# Altium PCB PCB1.PcbDoc
Units mm, origin at the board's own origin, x right, y up, seen from the top; angles counter-clockwise.
Board outline 99 x 99 mm, 2 copper layers (Top Layer, Bottom Layer); 73 components, 87 nets, 300 pads, 38 vias.
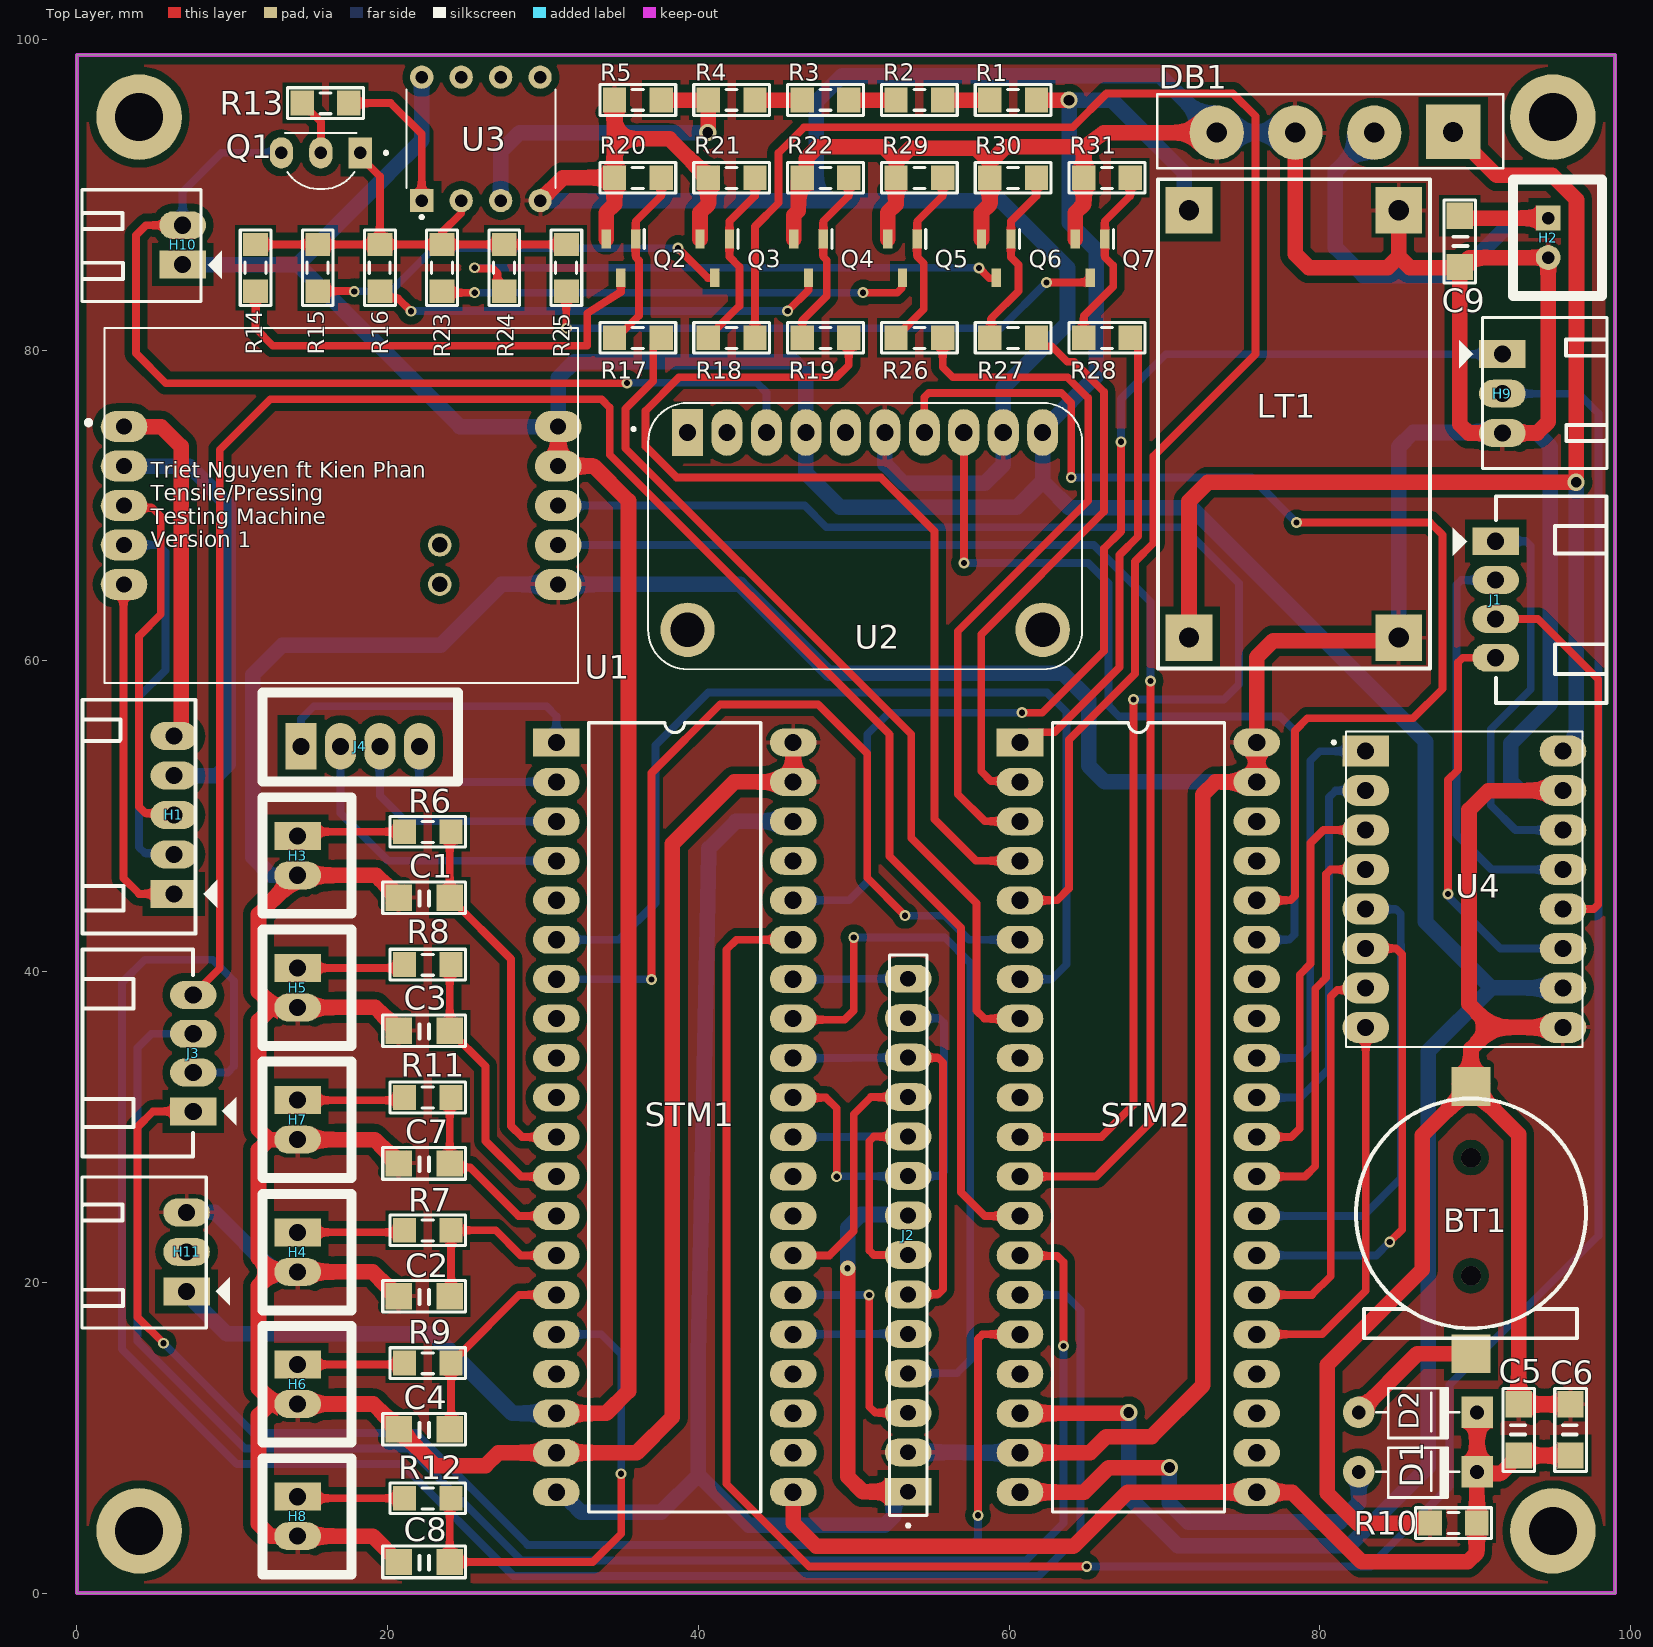
[diagram p0: Top Layer view]
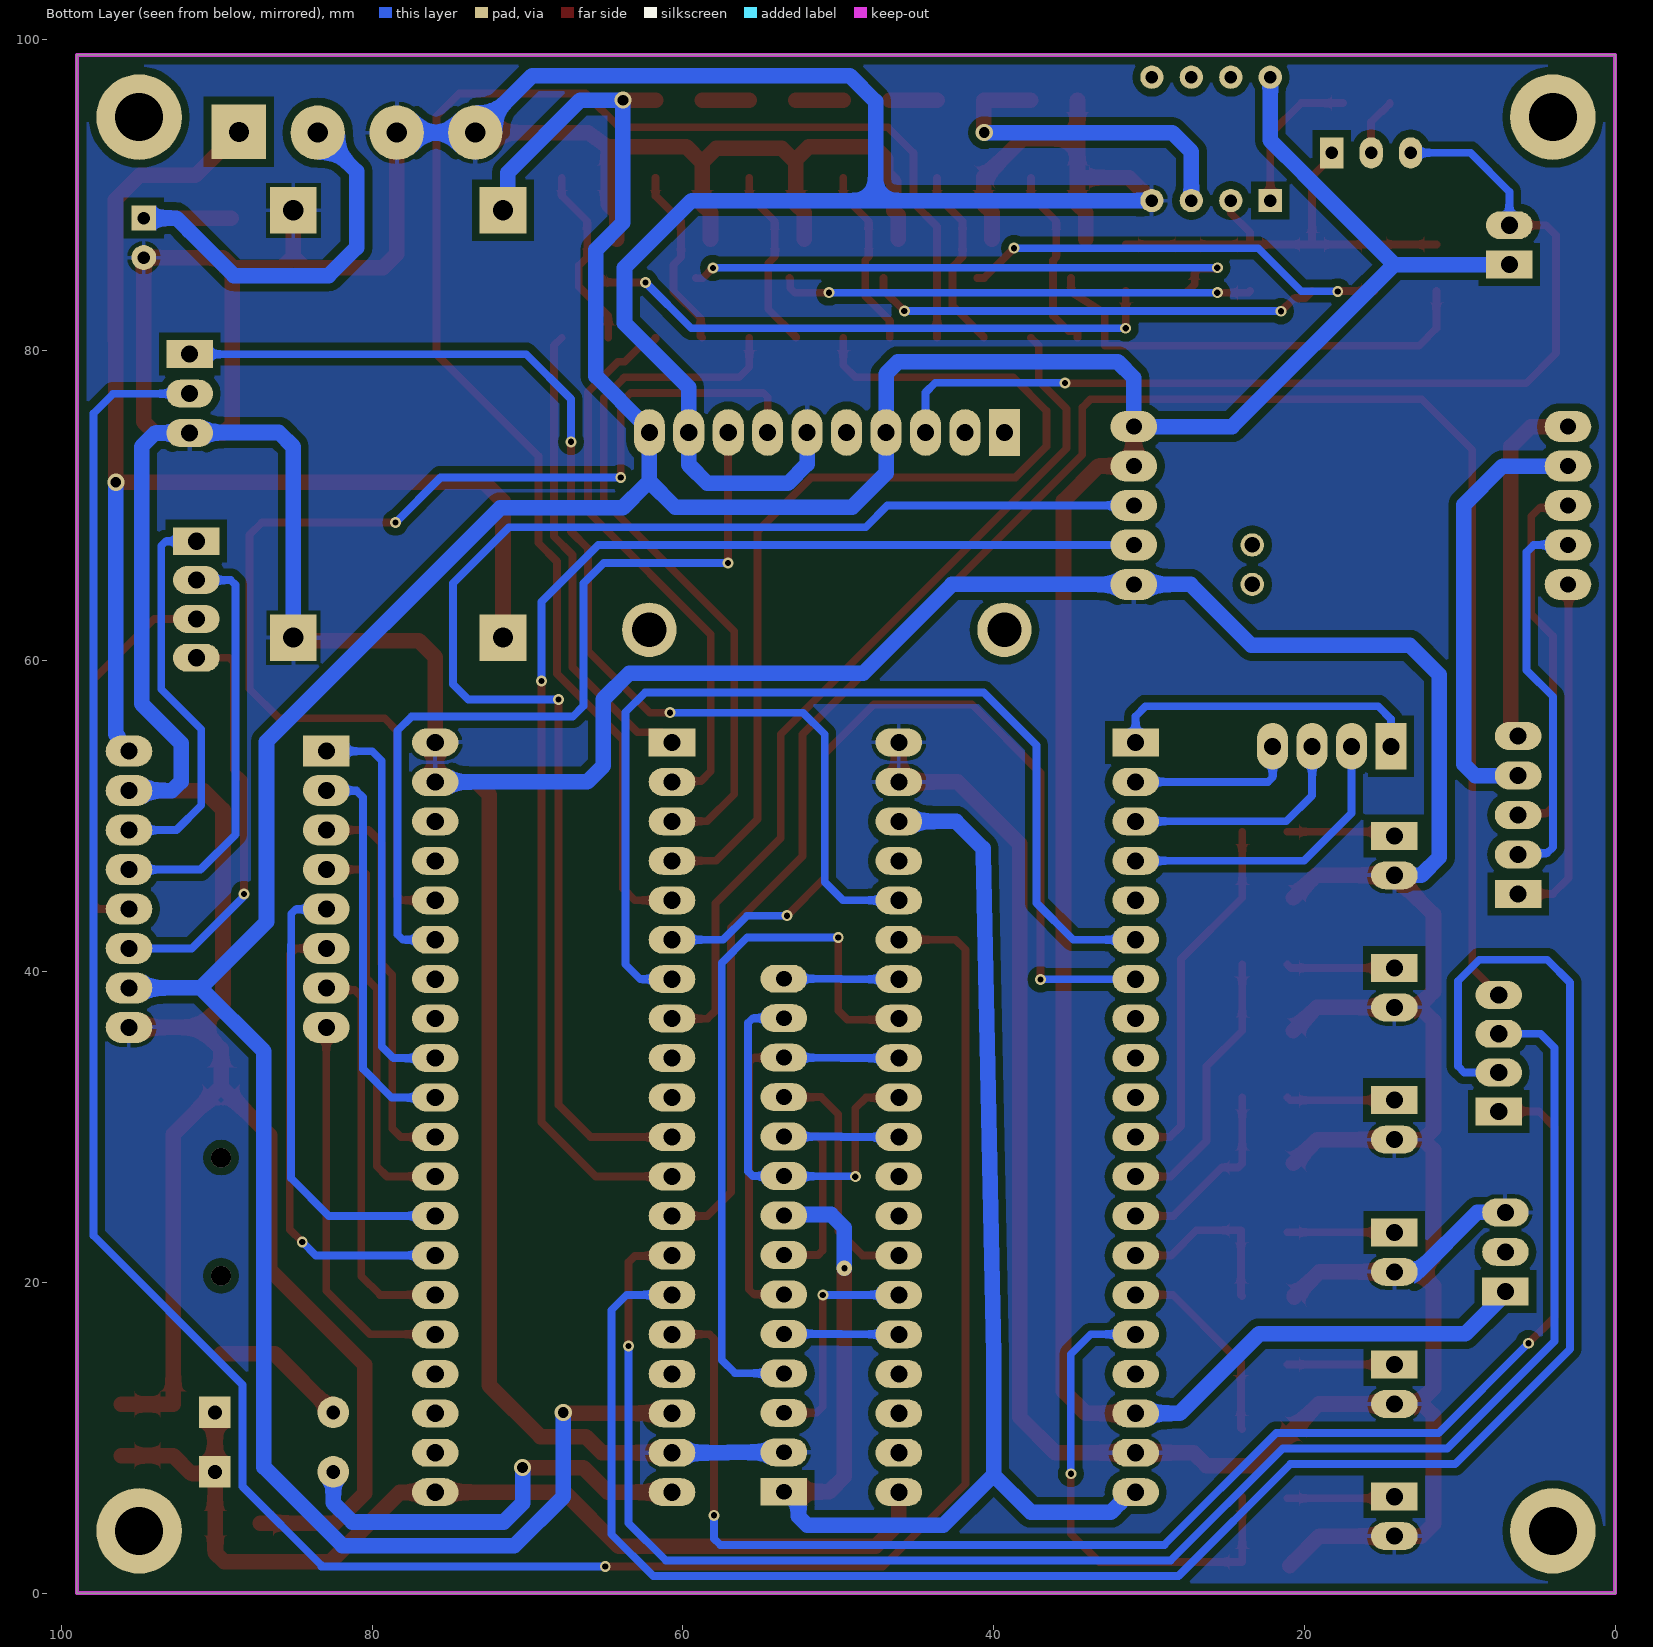
[diagram p1: Bottom Layer view, seen from below]
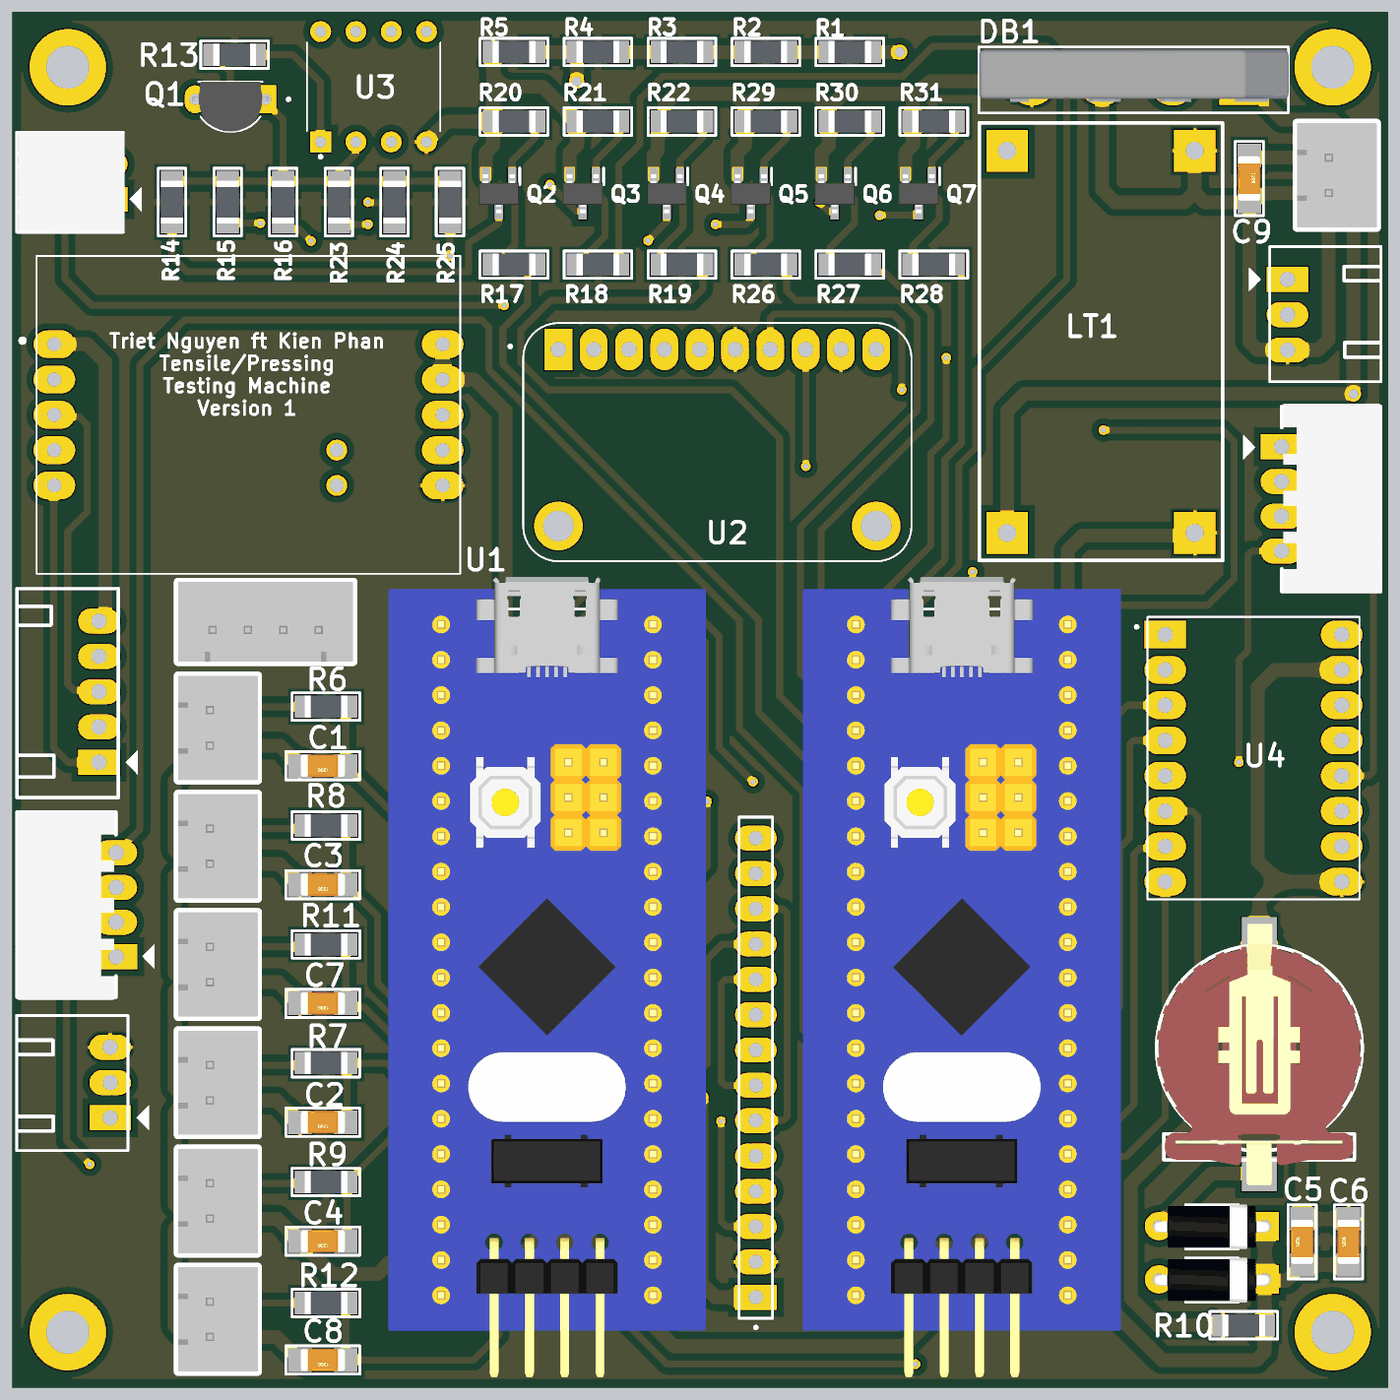
[diagram p2: 3D render of the assembled board from above, using the file's embedded part models]

## Layer stack, top to bottom
Top Solder: solder mask 0.0102, Solder Resist, Dk 3.5
Top Layer: signal copper 0.0356
Dielectric 1: dielectric 0.32, FR-4, Dk 4.8
Bottom Layer: signal copper 0.0356
Bottom Solder: solder mask 0.0102, Solder Resist, Dk 3.5

## Board outline
0,0 0,99 99,99 99,0

## Design rules (kind name [scope] priority, off if disabled: settings)
Clearance [All] p1: gap=0.5 ignorepadtopadclearanceinfootprint=FALSE
HoleSize [All] p1: absolutevalues=TRUE maxlimit=3.2 minlimit=0.025 maxpercent=80.000 minpercent=20.000
PolygonConnect [All] p1: connectstyle=Relief reliefconductorwidth=0.254 reliefentries=4 polygonreliefangle="90 Angle" airgapwidth=0.254
RoutingVias RoutingVias_power [InNetClass('power_class')] p1: holewidth=0.7 width=1.1 viastyle="Through Hole" minholewidth=0.7 minwidth=1.1 maxholewidth=0.7 maxwidth=1.1
RoutingVias RoutingVias_signal [All] p2: holewidth=0.4 width=0.7 viastyle="Through Hole" minholewidth=0.4 minwidth=0.7 maxholewidth=0.4 maxwidth=0.7
SilkToSilkClearance [All] p1: silktosilkclearance=0
SilkToSolderMaskClearance [IsPad] p1: minsilkscreentomaskgap=0 clearancetoexposedcopper=TRUE
SolderMaskExpansion [All] p1: expansion=0.102 istentingtop=FALSE
Width Width_power [InNetClass('power_class')] p1: maxlimit=2 minlimit=0.7 preferedwidth=1
Width Width_signal [All] p2: maxlimit=0.5 minlimit=0.5 preferedwidth=0.5
27 further rules are at their usual default settings.

## Classes and differential pairs
net class power_class: +5 +12 B_3.3V BLK GND IN+ NetBT1_1 NetR1_1 NetR2_1 NetR3_1 RED T_3.3V VBAT VCC

## Components (designator, comment, footprint, x,y, rotation, side; value= is the part's Value field where it differs from the comment)
BT1 "CR1220 SMD" "DE PIN CR1220" 89.723,24 r0 top
C1 "10nF" "Cap 1206" 22.35,44.75 r180 top
C2 "10nF" "Cap 1206" 22.35,19.1 r180 top
C3 "10nF" "Cap 1206" 22.35,36.2 r180 top
C4 "10nF" "Cap 1206" 22.35,10.55 r180 top
C5 "4.7uF" "Cap 1206" 92.8,10.5 r90 top
C6 "100nF" "Cap 1206" 96.136,10.5 r90 top
C7 "10nF" "Cap 1206" 22.35,27.65 r180 top
C8 "10nF" "Cap 1206" 22.35,2 r180 top
C9 "100uF" "Cap 1206" 89,87 r270 top
D1 "0.3V" "DIODE 1A" 81.23,7.8 r180 top
D2 "0.3V" "DIODE 1A" 81.23,11.629 r180 top
DB1 "6A 1000V" "DIODE CAU 6A CAM" 88.58,94 r180 top
H1 "LOADCELL" "Header 5P DC 2.54" 6.241,45 r180 top
H2 "POWER" XH2.54M-2#1 94.7,88.5 r270 top
H3 "BUTTON1" XH2.54M-2#2 14.2,48.74 r270 top
H4 "BUTTON4" XH2.54M-2#2 14.2,23.216 r270 top
H5 "BUTTON2" XH2.54M-2#2 14.2,40.232 r270 top
H6 "BUTTON5" XH2.54M-2#2 14.2,14.708 r270 top
H7 "BUTTON3" XH2.54M-2#2 14.2,31.724 r270 top
H8 "BUTTON6" XH2.54M-2#2 14.2,6.2 r270 top
H9 "COMPORT" "Header 3P DC 2.54" 91.746,79.74 r0 top
H10 "QUEDO" "Header 2P DC 2.54" 6.8,85.5 r180 top
H11 "AD5600" "Header 3P DC 2.54" 7.054,19.42 r180 top
J1 "MOTOR" "Header 4P DC 2.54" 91.34,67.675 r0 top
J2 "TFT_TOUCH" SAMTEC_ESQ-114-38-G-S 53.5,6.52 r90 top
J3 "AD5600" "Header 4P DC 2.54" 7.46,31.025 r180 top
J4 "SDCARD" XH2.54M-4 14.42,54.5 r0 top
LT1 "LT3045" PCBComponent_1 85.078,61.5 r90 top
Q1 "2N3904" TO92254P460H750-3 15.7,92.7 r180 top
Q2 "AO3400" SOT95P280X125-3N 35.012,85.9 r270 top
Q3 "AO3400" SOT95P280X125-3N 41.052,85.9 r270 top
Q4 "AO3400" SOT95P280X125-3N 47.092,85.9 r270 top
Q5 "AO3400" SOT95P280X125-3N 53.132,85.9 r270 top
Q6 "AO3400" SOT95P280X125-3N 59.172,85.9 r270 top
Q7 "AO3400" SOT95P280X125-3N 65.212,85.9 r270 top
R1 "1K" "RES 1206" 60.26,96.1 r0 top
R2 "1K" "RES 1206" 54.22,96.1 r0 top
R3 "1K" "RES 1206" 48.18,96.1 r0 top
R4 "1K" "RES 1206" 42.14,96.1 r0 top
R5 "1K" "RES 1206" 36.1,96.1 r0 top
R6 "100R" "RES 1206" 22.579,49 r180 top
R7 "100R" "RES 1206" 22.579,23.35 r180 top
R8 "100R" "RES 1206" 22.579,40.45 r180 top
R9 "100R" "RES 1206" 22.579,14.8 r180 top
R10 "1M" "RES 1206" 88.6,4.5 r0 top
R11 "100R" "RES 1206" 22.579,31.9 r180 top
R12 "100R" "RES 1206" 22.579,6.1 r180 top
R13 "1K" "RES 1206" 16,95.9 r180 top
R14 "10R" "RES 1206" 11.5,85.3 r90 top
R15 "100R" "RES 1206" 15.5,85.3 r90 top
R16 "1K" "RES 1206" 19.5,85.3 r90 top
R17 "1K" "RES 1206" 36.1,80.8 r180 top
R18 "1K" "RES 1206" 42.14,80.8 r180 top
R19 "1K" "RES 1206" 48.18,80.8 r180 top
R20 "10K" "RES 1206" 36.1,91.1 r180 top
R21 "10K" "RES 1206" 42.14,91.1 r180 top
R22 "10K" "RES 1206" 48.18,91.1 r180 top
R23 "10K" "RES 1206" 23.5,85.3 r90 top
R24 "100K" "RES 1206" 27.5,85.3 r90 top
R25 "1M" "RES 1206" 31.5,85.3 r90 top
R26 "1K" "RES 1206" 54.22,80.8 r180 top
R27 "1K" "RES 1206" 60.26,80.8 r180 top
R28 "1K" "RES 1206" 66.3,80.8 r180 top
R29 "10K" "RES 1206" 54.22,91.1 r180 top
R30 "10K" "RES 1206" 60.26,91.1 r180 top
R31 "10K" "RES 1206" 66.3,91.1 r180 top
STM1 "KIT STM32F103C8T6" "STM32F103 KIT" 30.86,54.75 r0 top
STM2 "KIT STM32F103C8T6" "STM32F103 KIT" 60.7,54.75 r0 top
U1 "SEN-13879" SPARKFUN_SEN-13879 17,70 r0 top
U2 "ADS1115" MODULE_ZC261500 50.73,68.032 r180 top
U3 "OPA2134PA" DIP794W45P254L959H508Q8 26,93.6 r90 top
U4 "A4988_STEPPER_MOTOR_DRIVER_CARRIER" MODULE_A4988_STEPPER_MOTOR_DRIVER_CARRIER 89.3,45.3 r0 top

## Footprints (in the part's own frame and the unit in brackets; to place one, negate y for a bottom-side part, rotate by r counter-clockwise, add the part's x,y. Pads: shape width x height; smd on the part's side, far side on the other; paste and mask are expansions set on the pad)
"Cap 1206" [mm]
  rect 1.7x1.7 smd: 1(-1.65,0) 2(1.65,0)
  silkscreen extent -2.67,-1.02 2.67,1.02, body extent -1.6,-0.8 1.6,0.8, height 1.02
"DE PIN CR1220" [mm]
  rect 2.5x2.5 smd: 1(0,-8.6) 2(0,8.6)
  silkscreen extent -7.39,-7.6 7.4,7.84, body extent -7.39,-9.42 7.36,9.38, height 4.27
"DIODE 1A" [mil] "Diode 1A"
  round 80 hole 35: 1(-50,0)
  rect 80x80 hole 35: 2(-350,0)
  silkscreen extent -305,-61 -95,65, body extent -366,-61 -34,65, height 122
"DIODE CAU 6A CAM" [mm] "DIODE CAU 6A CAM"
  rect 3.5x3.5 hole 1.3: 1(0,-0.051)
  round 3.5 hole 1.3: 2(5.08,0) 3(10.16,0) 4(15.215,0)
  silkscreen extent -3.23,-2.46 19.05,2.3, body extent -3.28,-2.29 19.02,1.47, height 23.8
DIP794W45P254L959H508Q8 [mm]
  rect 1.5x1.5 hole 0.8: 1(-3.97,3.81)
  round 1.5 hole 0.8: 2(-3.97,1.27) 3(-3.97,-1.27) 4(-3.97,-3.81) 5(3.97,-3.81) 6(3.97,-1.27) 7(3.97,1.27) 8(3.97,3.81)
  silkscreen extent -5.13,-4.79 3.18,4.8
"Header 2P DC 2.54" [mm]
  rect 3x1.8 hole 1.1: 1(0,0)
  oval 3x1.8 hole 1.1: 2(0,-2.54)
  silkscreen extent -2.53,-4.83 6.48,2.36, body extent -1.27,-4.82 6.35,2.28, height 6.01
"Header 3P DC 2.54" [mm]
  rect 3x1.8 hole 1.1: 1(0,0)
  oval 3x1.8 hole 1.1: 2(0,-2.54) 3(0,-5.08)
  silkscreen extent -2.78,-7.37 6.73,2.36
"Header 4P DC 2.54" [mm]
  rect 3x1.8 hole 1.1: 1(-0.025,0.025)
  oval 3x1.8 hole 1.1: 2(-0.025,-2.475) 3(-0.025,-4.975) 4(-0.025,-7.475)
  silkscreen extent -2.78,-10.39 7.11,2.92, body extent 0.13,-10.48 7.06,3.11, height 7.38
"Header 5P DC 2.54" [mm]
  rect 3x1.8 hole 1.1: 1(0,0)
  oval 3x1.8 hole 1.1: 2(0,-2.54) 3(0,-5.08) 4(0,-7.62) 5(0,-10.16)
  silkscreen extent -2.79,-12.5 5.89,2.54
MODULE_A4988_STEPPER_MOTOR_DRIVER_CARRIER [mm]
  rect 3x2 hole 1.1: 1(-6.35,8.89)
  oval 3x2 hole 1.1: 2(-6.35,6.35) 3(-6.35,3.81) 4(-6.35,1.27) 5(-6.35,-1.27) 6(-6.35,-3.81) 7(-6.35,-6.35) 8(-6.35,-8.89) 9(6.35,-8.89) 10(6.35,-6.35) 11(6.35,-3.81) 12(6.35,-1.27) 13(6.35,1.27) 14(6.35,3.81) 15(6.35,6.35) 16(6.35,8.89)
  silkscreen extent -8.5,-10.16 7.62,10.16
MODULE_ZC261500 [mm]
  rect 2x3 hole 1.1: 1(11.43,-6.668)
  oval 2x3 hole 1.1: 2(8.89,-6.668) 3(6.35,-6.668) 4(3.81,-6.668) 5(1.27,-6.668) 6(-1.27,-6.668) 7(-3.81,-6.668) 8(-6.35,-6.668) 9(-8.89,-6.668) 10(-11.43,-6.668)
  round 3.5 hole 2.2: P1(-11.43,6.032) P2(11.43,6.032)
  silkscreen extent -13.97,-8.57 15,8.57
PCBComponent_1 [mm]
  rect 3x3 hole 1.3: 1(27.5,13.5) 2(27.5,0) 3(0,0) 4(0,13.5)
  silkscreen extent -1.98,-2 29.5,15.51
"RES 1206" [mm]
  rect 1.5x1.6 smd: 1(-1.5,0) 2(1.5,0)
  silkscreen extent -2.44,-0.99 2.44,0.99, body extent -1.55,-0.8 1.55,0.8, height 0.55
SAMTEC_ESQ-114-38-G-S [mm]
  rect 1.8x3 hole 1.02: 01(0,0)
  oval 1.8x3 hole 1.02: 02(2.54,0) 03(5.08,0) 04(7.62,0) 05(10.16,0) 06(12.7,0) 07(15.24,0) 08(17.78,0) 09(20.32,0) 10(22.86,0) 11(25.4,0) 12(27.94,0) 13(30.48,0) 14(33.02,0)
  silkscreen extent -2.27,-1.2 34.54,1.21
SOT95P280X125-3N [mm]
  rect 1.2x0.6 smd: 1(-1.25,0.95) 2(-1.25,-0.95) 3(1.25,0)
  silkscreen extent -1.85,1.5 -0.65,1.5, body extent -1.4,-1.45 1.4,1.45, height 1.25
SPARKFUN_SEN-13879 [mil]
  oval 118.11x78.74 hole 40: 1(-550,200) 2(-550,100) 3(-550,0) 4(-550,-100) 5(-550,-200) 6(550,-200) 7(550,-100) 8(550,0) 9(550,100) 10(550,200)
  round 59.06 hole 39.37: 11(250,-100) 12(250,-200)
  silkscreen extent -646,-450 600,450
"STM32F103 KIT" [mm]
  rect 3x1.8 hole 1.1: 1(0,0)
  oval 3x1.8 hole 1.1: 2(0,-2.54) 3(0,-5.08) 4(0,-7.62) 5(0,-10.16) 6(0,-12.7) 7(0,-15.24) 8(0,-17.78) 9(0,-20.32) 10(0,-22.86) 11(0,-25.4) 12(0,-27.94) 13(0,-30.48) 14(0,-33.02) 15(0,-35.56) 16(0,-38.1) 17(0,-40.64) 18(0,-43.18) 19(0,-45.72) 20(0,-48.26) 21(15.24,-48.26) 22(15.24,-45.72) 23(15.24,-43.18) 24(15.24,-40.64) 25(15.24,-38.1) 26(15.24,-35.56) 27(15.24,-33.02) 28(15.24,-30.48) 29(15.24,-27.94) 30(15.24,-25.4) 31(15.24,-22.86) 32(15.24,-20.32) 33(15.24,-17.78) 34(15.24,-15.24) 35(15.24,-12.7) 36(15.24,-10.16) 37(15.24,-7.62) 38(15.24,-5.08) 39(15.24,-2.54) 40(15.24,0)
  silkscreen extent 2.09,-49.53 13.16,1.27, body extent -3.81,-53.97 19.05,3.59, height 16.12
TO92254P460H750-3 [mm]
  rect 1.5x2 hole 0.8: 1(-2.54,0)
  oval 1.5x2 hole 0.8: 2(0,0) 3(2.54,0)
  silkscreen extent -4.29,-1.27 2.3,2.33, body extent -2.74,-1.27 2.74,2.33, height 8.09
XH2.54M-2#1 [mm]
  rect 1.6x1.6 hole 0.8: 1(0,0)
  round 1.6 hole 0.8: 2(2.54,0)
  silkscreen extent -2.48,-2.26 5.02,3.46, body extent -2.48,-2.26 5.02,3.48, height 6.91
XH2.54M-2#2 [mm]
  rect 1.8x3 hole 1.1: 1(0,0)
  oval 1.8x3 hole 1.1: 2(2.54,0)
  silkscreen extent -2.48,-2.26 5.02,3.46, body extent -2.48,-2.26 5.02,3.48, height 6.91
XH2.54M-4 [mm]
  rect 2x3 hole 1.1: 1(0,0)
  oval 2x3 hole 1.1: 2(2.54,0) 3(5.08,0) 4(7.62,0)
  silkscreen extent -2.48,-2.26 10.1,3.46, body extent -2.48,-2.26 10.1,3.48, height 6.91

## Part data
BT1: library part "De pin CR1220 SMD", Ma_Hang=MH000833, Ten="Đế PIN CR1220 SMD"
C1 C2 C3 C4 C5 C6 C7 C8 C9: library part "Cap 1206", "Capacitor SMD 1206"
D1 D2: library part "Diode 1N4007", "Cắm", Chung_Loai=Cắm, Don_Vi=Con, Ma_Hang=MH001063, Ten_Linh_Kien="Diode 1N4007 1A (DIP)"
DB1: library part "Diode CAU 6A", "Cắm", Chung_Loai=cắm, Don_Vi=Con, Ma_Hang=MH004297, Ten_Linh_Kien="Diode Cầu 6A 1000V KBL610"
H1: library part "Header 5P 2.54 Duc Thang", "Cắm", Chung_Loai=Cắm, Don_Vi=Con, Ma_Hang=MH001298, Ten_Linh_Kien="Header 5P XH2.54-5P Đực Thẳng"
H2 H3 H4 H5 H6 H7 H8 H10: library part "Header 2P 2.54 Duc Thang", "Cắm", Chung_Loai=Cắm, Don_Vi=Con, Ma_Hang=MH001283, Ten_Linh_Kien="Header 2P XH2.54-2P Đực Thẳng"
H9 H11: library part "Header 3P 2.54 Duc Thang", "Cắm", Chung_Loai=Cắm, Don_Vi=Con, Ma_Hang=MH001292, Ten_Linh_Kien="Header 3P XH2.54-3P Đực Thẳng"
J1 J3 J4: library part CON-PLG_4X1-78-ST-TH, "Connector Header Through Hole 4 position 0.079\" (2.00mm)", Alternate Part Number-1=NA, Case/Package=TH, Crimp Part Number=ASPHSPH24K51, Manufacturer=JST, Manufacturer Part Number=B4B-PH-K-S(LF)(SN), Mating Part Number=PHR-4, Supplier Part Number-1=NA, Supplier-1="SP Road"
J2: library part ESQ-114-38-G-S, Package=None, Availability=Unavailable, MP=ESQ-114-38-G-S, Price=None
Q1: "BJT, TO-92, 40V, 200mA, NPN, 0.625W, 150Â°C", Package="TO-92 Diotec", Check_prices=https://www.snapeda.com/parts/2N3904/Diotec/view-part/?ref=eda, MF="Diotec Semiconductor", MP=2N3904, SnapEDA_Link=https://www.snapeda.com/parts/2N3904/Diotec/view-part/?ref=snap
Q2 Q3 Q4 Q5 Q6 Q7: "N-Channel 30 V 5.8A (Ta) 1.4W (Ta) Surface Mount SOT-23-3", Package="SOT-23-3 Alpha &amp; Omega Semiconductor", Check_prices=https://www.snapeda.com/parts/AO3400/Alpha+%2526+Omega+Semiconductor+Inc./view-part/?ref=eda, MF="Alpha &", MP=AO3400, SnapEDA_Link=https://www.snapeda.com/parts/AO3400/Alpha+%2526+Omega+Semiconductor+Inc./view-part/?ref=snap
R1 R2 R3 R4 R5 R6 R7 R8 R9 R10 R11 R12 R13 R14 R15 R16 R17 R18 R19 R20 R21 R22 R23 R24 R25 R26 R27 R28 R29 R30 R31: library part "RES 1206", "RES SMD 1206", Manufacturer="Vishay Dale", Manufacturer Part Number=CRCW040210K0FKED, Operating Temperature="-55°C ~ 155°C", Package / Case="0402 (1005 Metric)", Power (Watts)="0.063W, 1/16W", Resistance (Ohms)=10k, Supplier Part Number 1=541-10.0KLCT-ND, Temperature Coefficient=±100ppm/°C, Tolerance=±1%, Category=Resistors, ComponentLink1Description=http://www.vishay.com/docs/20035/dcrcwe3.pdf, ComponentLink1URL=http://www.vishay.com/docs/20035/dcrcwe3.pdf, Composition="Thick Film", Features="Automotive AEC-Q200", Height="0.016\" (0.40mm)", Number of Terminations=2, Packaging="Cut Tape (CT)", Pricing 1="10=0.083, 50=0.0444, 200=0.0255, 1000=0.0174 (USD)", RoHS="RoHS Compliant", Size / Dimension="0.039\" L x 0.020\" W (1.00mm x 0.50mm)", Stock 1=2392462, Supplier 1=Digi-Key, Supplier Device Package="0402 (1005 Metric)"
STM1 STM2: library part "STM32f103 Bluepill", "KIT STM32F103C8T6 Bluepill"
U1: "Load Cell Amp Hx711", Package=None, Availability=Unavailable, MP=SEN-13879, Price=None
U2: library part ZC261500, "ADS1115 Module ADC 4 channel with Pro Gain Amplifier for Arduino RPi", Package=None, Availability=Unavailable, MF=YKS, MP=ZC261500, Price=None, SnapEDA_Link=https://www.snapeda.com/parts/ZC261500/YKS/view-part/621058/?ref=snap
U3: "SoundPlus&trade; Audio Operational Amplifier with Low Distortion, Low Noise and Precision 8-PDIP -40 to 85", Package="PDIP-8 Texas Instruments", Availability=Unavailable, BuyPart=https://www.snapeda.com/parts/OPA2134PA/Texas%20Instruments/view-part/621607/?ref=eda, MF="Texas Instruments", MP=OPA2134PA, Price=None, SnapEDA_Link=https://www.snapeda.com/parts/OPA2134PA/Texas%20Instruments/view-part/621607/?ref=snap, Texas_Instruments-Purchase-URL=https://snapeda.com/shop?store=Texas+Instruments&id=621607
U4: "Stepper motor controler; IC: A4988; 1A; Uin mot: 8Ã·35V", Package=None, Availability=Unavailable, MP=A4988_STEPPER_MOTOR_DRIVER_CARRIER, Price=None

## Free pads (board coordinates)
  round 5.5 hole 3.1 unplated: 1(4,95) 2(4,4) 3(95,95) 4(95,4)

## Via types
v1: diameter 0.7, hole 0.4, Top Layer to Bottom Layer, 30 vias
v2: diameter 1.1, hole 0.7, Top Layer to Bottom Layer, 5 vias
v3: diameter 1.27, hole 1.27, Top Layer to Bottom Layer, 2 vias
v4: diameter 1, hole 0.4, Top Layer to Bottom Layer, 1 vias

## Nets (pads, with @x,y where several pads share a name; then routed paths per layer and width w, separated by ;. In a path a pad name is that pad's centre, name@x,y a point inside that pad or via, vN(x,y) a via of type N, cw(c..) or ccw(c..) an arc to the next point about the centre after c; other vN are vias at no path point)
1A: J1.3 U4.12 | length 25.1
  Top Layer w0.5: J1.3 94.031,62.7 97.917,58.814 97.917,44.323 97.624,44.03 U4.12
1B: J1.4 U4.11 | length 26.7
  Top Layer w0.5: v1(88.25,45) 88.25,52.352 88.9,53.002 88.9,59.907 89.193,60.2 J1.4
  Bottom Layer w0.5: v1(88.25,45) 88.25,44.946 88.3,44.896 88.3,44.8 91.61,41.49 U4.11
2A: J1.2 U4.13 | length 26.5
  Bottom Layer w0.5: J1.2 89.1,65.2 88.798,64.898 88.798,48.819 91.047,46.57 U4.13
2B: J1.1 U4.14 | length 25.5
  Bottom Layer w0.5: J1.1 93.281,67.7 93.574,67.407 93.574,58.174 91,55.6 91,50.7 92.59,49.11 U4.14
+5: H10.1 H11.1 LT1.1 R1.2 STM1.18 STM2.18 U1.9 U1.10 U2.4 U2.10 U3.8 U4.10 | length 345.8
  Top Layer w1: STM1.18 34.07,11.57 35.5,13 35.5,70.3 33.26,72.54 U1.9 U1.10 ; STM2.18 67.623,11.57 67.673,11.62 v2(67.7,11.62) ; R1.2 61.76,96.088 v2(63.856,96.088)
  Bottom Layer w1: H10.1@6.81,85.51 14.214,85.51 ; H11.1 7.054,19.266 9.632,16.688 22.898,16.688 28.016,11.57 STM1.18 ; U3.8 22.19,93.498 19.99,91.298 19.99,91.286 14.214,85.51 ; 62.16,71.56 U2.10 ; 62.162,71.562 60.501,69.901 49.099,69.901 46.92,72.08 46.92,78.484 46.154,79.25 32.006,79.25 30.97,78.214 U1.10 24.644,75.08 14.214,85.51 ; 62.43,71.295 63.869,69.855 71.745,69.855 86.8,54.8 86.8,43.2 91.05,38.95 ; U2.10@62.43,75.159 65.6,78.329 65.6,86.465 63.856,88.21 v2(63.856,96.088) 66.612,96.088 71.286,91.414 71.286,89.292 LT1.1 ; v2(67.7,11.62) 67.7,6.189 70.839,3.05 81.917,3.05 86.97,8.103 86.97,34.87 91.05,38.95 ; U4.10 91.05,38.95
+12: C9.1 DB1.2 H2.1 | length 30.1
  Top Layer w1: C9.1@89.056,88.5 H2.1
  Bottom Layer w1: DB1.2 81,91.5 81,86.6 82.8,84.8 88.9,84.8 91.8,87.7 91.8,87.706 92.594,88.5 H2.1
ADC_SCL: STM2.35 U2.8 | length 54.2
  Top Layer w0.5: v1(57.1,66.3) 57.09,66.31 57.09,74.408 U2.8@57.1,74.418
  Bottom Layer w0.5: v1(57.1,66.3) 65.1,66.3 66.4,65 66.4,57.1 67.087,56.413 77.47,56.413 78.375,55.508 78.375,42.396 78.029,42.05 STM2.35
ADC_SDA: STM2.36 U2.7 | length 76.1
  Top Layer w0.5: U2.7 54.54,76.957 54.833,77.25 63.35,77.25 64,76.6 v1(64,71.8) ; STM2.36 78.107,44.59 78.4,44.883 78.4,55.5 79.2,56.3 86,56.3 87.9,58.2 87.9,68.1 87.1,68.9 v1(78.5,68.9)
  Bottom Layer w0.5: v1(64,71.8) 75.6,71.8 v1(78.5,68.9)
AS_DIR: J3.4 STM2.13 | length 126.8
  Top Layer w0.5: J3.4 9.195,40.209 9.195,73.595 12.435,76.835 33.765,76.835 34.3,76.3 34.3,73.268 52.3,55.268 52.3,47.42 56.9,42.82 56.9,25.8 58.43,24.27 STM2.13
AS_GPO: J3.1 STM2.16 | length 92.3
  Top Layer w0.5: v1(5.578,16.078) 3.9,17.756 3.9,30 4.9,31 J3.1 ; v1(58,5) 58,16.357 58.293,16.65 STM2.16
  Bottom Layer w0.5: v1(5.578,16.078) 11.356,10.3 21.806,10.3 29.006,3.1 57.6,3.1 58,3.5 v1(58,5)
AS_SCL: J3.3 STM2.14 | length 109.1
  Top Layer w0.5: STM2.14 60.732,21.698 63.102,21.698 63.5,21.3 v1(63.5,15.9)
  Bottom Layer w0.5: J3.3 4.8,36 3.9,35.1 3.9,16.2 10.8,9.3 21.391,9.3 28.591,2.1 61.1,2.1 63.5,4.5 v1(63.5,15.9)
AS_SDA: J3.2 STM2.15 | length 127.8
  Bottom Layer w0.5: J3.2 9.7,33.5 10.1,33.9 10.1,39.4 8.733,40.767 4.367,40.767 2.9,39.3 2.9,15.7 10.3,8.3 20.9,8.3 28.1,1.1 61.908,1.1 64.6,3.792 64.6,18.2 63.61,19.19 STM2.15
B_3.3V: D1.1 STM2.20 | length 27.8
  Top Layer w1: STM2.20 64.821,6.49 66.408,8.077 v2(70.319,8.077)
  Bottom Layer w1: v2(70.319,8.077) 70.319,5.781 71.528,4.572 81.272,4.572 82.5,5.8 D1.1
BLK: H1.4 U1.2 | length 28.2
  Bottom Layer w1: U1.2 7.239,72.54 9.728,70.051 9.728,53.34 9.008,52.62 H1.4
BUTTON1: C1.1 R6.1 STM1.11 | length 23.8
  Top Layer w0.5: R6.1@24,49 C1.1 27.94,40.81 27.94,30.06 28.65,29.35 STM1.11
BUTTON2: C3.1 R8.1 STM1.12 | length 17.8
  Top Layer w0.5: R8.1@24,40.45 C3.1 26.3,33.9 26.3,29.1 28.59,26.81 STM1.12
BUTTON3: C7.1 R11.1 STM1.13 | length 12.5
  Top Layer w0.5: R11.1@24,31.9 C7.1 24.257,27.393 25.307,27.393 28.428,24.272 30.858,24.272 STM1.13
BUTTON4: C2.1 R7.1 STM1.14 | length 11.7
  Top Layer w0.5: C2.1 24.079,19.179 R7.1 26.95,23.35 28.57,21.73 STM1.14
BUTTON5: C4.1 R9.1 STM1.15 | length 12.9
  Top Layer w0.5: C4.1 24.079,10.629 R9.1 24.079,14.85 24.579,15.35 24.629,15.35 28.469,19.19 STM1.15
BUTTON6: C8.1 R12.1 STM1.16 | length 32.2
  Top Layer w0.5: R12.1@24,6.187 C8.1 33.2,2 35.027,3.827 v1(35.027,7.68)
  Bottom Layer w0.5: STM1.16 33.75,16.65 35.027,15.373 v1(35.027,7.68)
CLK: STM2.12 U1.7 | length 83
  Top Layer w0.5: STM2.12 65.608,26.81 69.1,30.302 v1(69.1,58.7)
  Bottom Layer w0.5: U1.7 65.44,67.46 69.1,63.8 v1(69.1,58.7)
CS: J2.03 STM1.26 | length 14.7
  Top Layer w0.5: v1(50.99,19.19) 50.99,12.51 51,12.5 51,12 51.4,11.6 J2.03
  Bottom Layer w0.5: STM1.26 v1(50.99,19.19)
D/C: J2.05 STM1.25 | length 7.4
  Bottom Layer w0.5: STM1.25 49.784,16.65 49.814,16.68 J2.05
DAT: STM2.11 U1.8 | length 93.9
  Top Layer w0.5: STM2.11 65.938,29.35 68,31.412 v1(68,57.513)
  Bottom Layer w0.5: U1.8 46.84,70 48.235,68.605 71.195,68.605 74.8,65 74.8,58.5 73.813,57.513 v1(68,57.513)
GND: BT1.2 C1.2 C2.2 C3.2 C4.2 C5.2 C6.2 C7.2 C8.2 C9.2 DB1.3 DB1.4 H2.2 H3.2 H4.2 H5.2 H6.2 H7.2 H8.2 H9.3 H11.3 J2.02 LT1.2 LT1.3 Q2.2 Q3.2 Q4.2 Q5.2 Q6.2 Q7.2 R5.1 R10.1 R20.2 R21.2 R22.2 R29.2 R30.2 R31.2 STM1.19 STM1.39 STM1.40 STM2.19 STM2.39 STM2.40 U1.6 U2.6 U2.9 U3.4 U4.9 U4.15 | length 720.5
  Top Layer w1: C2.2@20.65,19.05 20.65,19.15 20.35,19.45 20.25,19.45 19.024,20.676 H4.2 12.598,20.676 ; C7.2 19.166,29.184 H7.2 12.345,29.184 ; C3.2 19.208,37.692 H5.2 12.7,37.692 ; C1.2 19.25,46.2 H3.2 13.816,46.2 13.447,45.83 13.447,45.447 11.684,43.684 11.684,38.708 12.7,37.692 ; C8.2@20.929,1.771 C8.2 19.04,3.66 H8.2 12.469,3.66 11.684,4.445 11.684,11.43 12.422,12.168 12.7,12.168 ; U3.4 31.28,91.1 R20.2 ; Q2.2 34.062,88.849 34.6,89.388 R20.2 ; R5.1 34.6,93.599 ; Q3.2 40.102,88.849 40.64,89.388 R21.2 40.64,91.15 40.39,91.4 40.34,91.4 38.141,93.599 34.6,93.599 ; STM1.40 STM1.39 42.31,52.21 38.329,48.229 38.329,11.329 36.03,9.03 STM1.19 27.13,9.03 26.3,8.2 23.05,8.2 C4.2 19.082,12.168 H6.2 12.7,12.168 ; Q4.2 46.142,88.697 46.43,88.985 46.43,90.85 R22.2 46.93,91.35 46.93,92.325 47.705,93.1 51.883,93.1 52.72,92.263 52.72,92.075 ; Q5.2 52.182,88.849 52.72,89.388 R29.2 52.72,92.075 ; Q6.2 58.222,88.849 58.76,89.388 R30.2 58.76,92.075 ; STM2.19 65.215,9.03 66.255,10.07 69.17,10.07 72.466,13.366 72.466,51.397 73.279,52.21 STM2.39 STM2.40 75.94,60.24 77,61.3 84.878,61.3 LT1.3 ; Q7.2 64.262,88.849 64.8,89.388 R31.2 64.8,92.71 64.597,92.913 64.853,93.1 ; DB1.4 66.09,94 64.853,93.1 ; DB1.3 78.42,86.18 79.3,85.3 84.356,85.3 85.078,86.022 ; LT1.2 85.078,86.022 ; R10.1@87.199,4.5 R10.1 82.4,4.5 80.467,6.433 80.467,14.681 86.6,20.814 86.6,29.477 BT1.2 ; U4.9 91.11,36.41 ; U4.15 90.85,51.65 89.6,50.4 89.6,37.92 91.11,36.41 ; C6.2 C5.2 92.8,29.523 BT1.2 ; 12.345,29.184 11.684,28.523 11.684,21.59 12.598,20.676 ; 12.345,29.184 11.684,29.845 11.684,36.83 12.546,37.692 12.7,37.692 ; 12.598,20.676 11.684,19.762 11.684,13.184 12.7,12.168 ; R20.2 34.6,93.599 ; 52.72,92.075 53.645,93 57.835,93 58.76,92.075 ; 58.76,92.075 59.785,93.1 64.853,93.1 ; 85.078,86.022 85.8,85.3 88.95,85.3 C9.2 ; C9.2 89,75.246 89.586,74.66 93.98,74.66 94.7,75.38 H2.2 89.61,85.96 C9.2 ; BT1.2 89.723,35.023 91.11,36.41
  Bottom Layer w1: H11.3 8.876,24.5 12.7,20.676 H4.2 ; H3.2 12.474,46.2 11.3,47.374 11.3,59.1 13.2,61 23.4,61 27.32,64.92 U1.6 42.68,64.92 48.382,59.218 63.439,59.218 65.126,57.531 65.126,53.241 66.157,52.21 STM2.39 ; U3.4 47.6,89.63 ; U2.6 52,72.66 53.238,71.422 58.42,71.422 59.62,72.622 59.62,77.596 63.758,81.733 63.758,85.315 59.443,89.63 47.6,89.63 ; J2.02 57.074,9.06 57.104,9.03 STM2.19 ; DB1.3 DB1.4 69.702,97.663 49.251,97.663 47.6,96.012 47.6,89.63 ; LT1.3 85.078,73.778 86,74.7 91.706,74.7 H9.3 93.98,74.66 94.844,73.796 94.844,57.244 92.3,54.7 92.3,52.236 92.886,51.65 U4.15
GRN: H1.2 U1.4 | length 25
  Bottom Layer w0.5: U1.4 5.24,67.46 5.7,67 5.7,59.4 3.988,57.688 3.988,48.012 4.384,47.616 6.165,47.616 H1.2
IN+: R4.1 R5.2 U3.3 | length 22.1
  Top Layer w1: R5.2 R4.1 40.64,94.067 40.6,94.027 v2(40.6,94)
  Bottom Layer w1: U3.3 27.27,92.77 28.5,94 v2(40.6,94)
IN-: Q1.1 R14.2 R15.2 R16.2 R23.2 R24.2 R25.2 U3.2 | length 29.8
  Top Layer w0.5: R14.2 R15.2 R16.2 ; Q1.1 18.24,92.45 19.5,91.19 R16.2 ; U3.2 24.73,88.809 23.5,87.579 R23.2 ; R25.2 R24.2 R23.2 ; R16.2 R23.2
INA: Q1.2 R13.2 | length 3.7
  Top Layer w0.5: R13.2 14.5,95.85 15,95.35 15.05,95.35 15.7,94.7 Q1.2
INPUT: H10.2 Q1.3 U2.3 | length 64.6
  Top Layer w0.5: H10.2 4.44,88.04 3.8,87.4 3.8,79.8 5.724,77.876 v1(35.407,77.876)
  Bottom Layer w0.5: H10.2 6.8,90.2 9.3,92.7 Q1.3 ; v1(35.407,77.876) 35.43,77.9 43.757,77.9 44.38,77.277 U2.3
MS1: STM2.31 U4.2 | length 25.4
  Bottom Layer w0.5: STM2.31 78.74,31.89 80.588,33.737 80.588,51.225 81.012,51.65 U4.2
MS2: STM2.30 U4.3 | length 25.5
  Top Layer w0.5: STM2.30 78.15,29.35 78.7,29.9 78.7,39.8 79.4,40.5 79.4,48.276 80.234,49.11 U4.3
MS3: STM2.29 U4.4 | length 25.8
  Top Layer w0.5: STM2.29 79.043,26.81 79.7,27.467 79.7,38.9 80.19,39.39 80.4,39.6 80.4,46.277 80.693,46.57 U4.4
NetBT1_1: BT1.1 D2.1 | length 8.8
  Top Layer w1: D2.1 86.271,15.4 BT1.1
NetH3_1: H3.1 R6.2 | length 7
  Top Layer w0.5: H3.1 14.46,49 R6.2
NetH4_1: H4.1 R7.2 | length 6.9
  Top Layer w0.5: H4.1 R7.2@21.079,23.216
NetH5_1: H5.1 R8.2 | length 7
  Top Layer w0.5: H5.1 20.861,40.232 R8.2
NetH6_1: H6.1 R9.2 | length 6.9
  Top Layer w0.5: H6.1 R9.2@21.079,14.708
NetH7_1: H7.1 R11.2 | length 7
  Top Layer w0.5: H7.1 20.903,31.724 R11.2
NetH8_1: H8.1 R12.2 | length 6.9
  Top Layer w0.5: H8.1 14.3,6.1 R12.2
NetQ2_1: Q2.1 R17.2 R20.1 | length 12
  Top Layer w0.5: R17.2 34.6,81.22 35.17,81.22 36.17,82.22 36.17,85.771 35.962,85.979 Q2.1 35.962,88.29 37.6,89.929 R20.1
NetQ2_3: Q2.3 R14.1 | length 29.8
  Top Layer w0.5: R14.1 11.5,81.4 12.611,80.289 32.842,80.289 32.842,82.372 35.012,83.744 Q2.3
NetQ3_1: Q3.1 R18.2 R21.1 | length 12.1
  Top Layer w0.5: R18.2 40.64,80.85 42.64,82.85 42.64,85.366 42.002,86.004 Q3.1 42.002,88.29 43.64,89.929 R21.1
NetQ3_3: Q3.3 R15.1 | length 27.5
  Top Layer w0.5: R15.1 17.833,83.8 v1(17.85,83.783) ; v1(38.684,86.563) 40.597,84.65 Q3.3
  Bottom Layer w0.5: v1(17.85,83.783) 17.861,83.795 20.193,83.795 22.962,86.563 v1(38.684,86.563)
NetQ4_1: Q4.1 R19.2 R22.1 | length 11.7
  Top Layer w0.5: R19.2 46.68,81.91 48.26,83.49 48.26,85.786 48.042,86.004 Q4.1 48.042,88.29 49.68,89.929 R22.1
NetQ4_3: Q4.3 R16.1 | length 29.5
  Top Layer w0.5: R16.1 19.955,83.345 20.655,83.345 v1(21.5,82.5) ; v1(45.745,82.525) 47.092,83.871 Q4.3
  Bottom Layer w0.5: v1(21.5,82.5) 21.512,82.512 45.733,82.512 v1(45.745,82.525)
NetQ5_1: Q5.1 R26.2 R29.1 | length 11.9
  Top Layer w0.5: R26.2 52.72,80.85 54.5,82.63 54.5,85.586 54.082,86.004 Q5.1 54.082,88.29 55.72,89.929 R29.1
NetQ5_3: Q5.3 R23.1 | length 30.4
  Top Layer w0.5: R23.1 23.6,83.7 v1(25.6,83.7) ; v1(50.6,83.7) 52.789,83.7 53.082,83.993 53.082,84.6 Q5.3
  Bottom Layer w0.5: v1(25.6,83.7) v1(50.6,83.7)
NetQ6_1: Q6.1 R27.2 R30.1 | length 11.9
  Top Layer w0.5: R27.2 58.857,80.897 58.857,82.057 60.6,83.8 60.6,85.501 60.122,85.979 Q6.1 60.122,88.29 61.76,89.929 R30.1
NetQ6_3: Q6.3 R24.1 | length 36.8
  Top Layer w0.5: v1(25.6,85.3) 25.638,85.262 26.765,85.262 27.058,84.969 27.058,84.242 R24.1 ; v1(58.064,85.293) 58.725,84.633 59.172,84.633 Q6.3
  Bottom Layer w0.5: v1(25.6,85.3) 25.603,85.297 58.061,85.297 v1(58.064,85.293)
NetQ7_1: Q7.1 R28.2 R31.1 | length 12
  Top Layer w0.5: R28.2 64.8,82.2 66.7,84.1 66.7,85.441 66.162,85.979 Q7.1 66.162,88.29 67.8,89.929 R31.1
NetQ7_3: Q7.3 R25.1 | length 37.6
  Top Layer w0.5: v1(31.5,81.407) R25.1 ; v1(62.408,84.353) 65.212,84.353 Q7.3
  Bottom Layer w0.5: v1(31.5,81.407) 59.461,81.407 v1(62.408,84.353)
NetR1_1: R1.1 R2.2 | length 3
  Top Layer w1: R2.2 R1.1
NetR2_1: R2.1 R3.2 | length 3
  Top Layer w1: R3.2 R2.1
NetR3_1: R3.1 R4.2 | length 3
  Top Layer w1: R4.2 R3.1
OUT_A: R13.1 U3.1 | length 9.8
  Top Layer w0.5: R13.1 20.2,95.9 22.19,93.91 U3.1
R_1: R17.1 STM2.8 | length 56.6
  Top Layer w0.5: R17.1 37.1,80.3 37.1,78.014 35.3,76.214 35.3,73.682 53.7,55.282 53.7,48.6 57.9,44.4 57.9,37.491 58.421,36.97 STM2.8
R_2: R18.1 STM2.5 | length 103.6
  Top Layer w0.5: R18.1 43.64,87.963 45.161,89.484 45.161,92.71 46.801,94.35 64.099,94.35 66.269,96.52 74.397,96.52 75.865,95.052 75.865,79.752 69.3,73.186 69.3,67.6 68.1,66.4 68.1,59.169 63.856,54.925 63.856,45.356 63.09,44.59 STM2.5
R_3: R19.1 STM2.4 | length 64.4
  Top Layer w0.5: R19.1 49.68,79.038 48.892,78.25 38.75,78.25 36.6,76.1 36.6,73.796 38.596,71.8 51.746,71.8 55.2,68.346 55.2,49.8 57.87,47.13 STM2.4
R_4: R26.1 STM2.3 | length 45.8
  Top Layer w0.5: R26.1 55.72,78.908 56.378,78.25 63.764,78.25 63.814,78.2 65.1,76.914 65.1,70.3 56.7,61.9 56.7,51.415 58.445,49.67 STM2.3
R_5: R27.1 STM2.2 | length 36.3
  Top Layer w0.5: STM2.2 60.638,52.272 58.828,52.272 58.2,52.9 58.2,61.7 66.1,69.6 66.1,77.328 64.178,79.25 63.739,79.25 62.739,80.25 62.26,80.25 61.76,80.75 R27.1
R_6: R28.1 STM2.1 | length 30.3
  Top Layer w0.5: STM2.1 61.35,55.4 62.917,55.4 67.1,59.583 67.1,66.814 68.3,68.014 68.3,80.3 R28.1
RED: H1.5 U1.1 | length 23.1
  Top Layer w1: U1.1 5.42,75.08 6.7,73.8 6.7,55.53 6.33,55.16 H1.5
RESET: J2.04 STM1.33 | length 47
  Top Layer w0.5: STM1.33 46.17,36.9 49.4,36.9 50,37.5 v1(50,42.2)
  Bottom Layer w0.5: v1(50,42.2) 55.85,42.2 57.5,40.55 57.5,15 56.64,14.14 J2.04
S_DIR: STM2.25 U4.8 | length 25.1
  Top Layer w0.5: STM2.25 80.137,16.65 82.95,19.463 U4.8
S_EN: STM2.32 U4.1 | length 26
  Bottom Layer w0.5: STM2.32 78.63,34.43 79.375,35.175 79.375,53.575 79.99,54.19 U4.1
S_PUL: STM2.26 U4.7 | length 25.7
  Top Layer w0.5: STM2.26 79.49,19.19 80.7,20.4 80.7,38.4 81.113,38.813 82.813,38.813 U4.7
S_RES: STM2.28 U4.5 | length 29.7
  Bottom Layer w0.5: STM2.28 82.792,24.27 85.217,26.695 85.217,41.715 85.2,41.732 85.2,43.719 84.907,44.012 82.968,44.012 U4.5
S_SLEEP: STM2.27 U4.6 | length 30.3
  Top Layer w0.5: U4.6 84.91,41.49 85.3,41.1 85.3,23.4 v1(84.5,22.6)
  Bottom Layer w0.5: STM2.27 83.63,21.73 v1(84.5,22.6)
SCK: J2.07 J2.10 STM1.30 | length 19.7
  Top Layer w0.5: J2.07 51.293,21.76 51,22.053 51,29.087 51.293,29.38 J2.10
  Bottom Layer w0.5: STM1.30 49.784,29.35 49.814,29.38 J2.10
SD_CS: J4.1 STM1.1 | length 20.5
  Bottom Layer w0.5: J4.1 14.42,56.254 15.24,57.074 30.226,57.074 30.86,56.44 STM1.1
SD_MISO: J4.3 STM1.3 | length 15.2
  Bottom Layer w0.5: J4.3 19.5,51.333 21.164,49.67 STM1.3
SD_MOSI: J4.2 STM1.4 | length 19.5
  Bottom Layer w0.5: J4.2 16.96,50.19 20.021,47.13 STM1.4
SD_SCK: J4.4 STM1.2 | length 10.9
  Bottom Layer w0.5: J4.4 22.04,52.503 22.333,52.21 STM1.2
SDI: J2.06 J2.12 STM1.32 | length 26.8
  Top Layer w0.5: J2.06 53.506,19.226 55.427,19.226 55.75,19.549 55.75,34.131 55.427,34.454 53.506,34.454 J2.12
  Bottom Layer w0.5: STM1.32 49.784,34.43 49.814,34.46 J2.12
SDO: J2.09 J2.13 STM1.31 | length 26.5
  Top Layer w0.5: STM1.31 48.21,31.89 48.9,31.2 v1(48.9,26.8)
  Bottom Layer w0.5: v1(48.9,26.8) 48.92,26.82 53.48,26.82 J2.09 55.507,26.84 55.8,27.133 55.8,36.707 55.507,37 J2.13
T_3.3V: J2.01 J2.08 STM1.20 STM1.38 | length 98.2
  Top Layer w1: v4(49.6,20.9) 49.6,7.5 50.58,6.52 J2.01
  Bottom Layer w1: STM1.20 31.244,6.49 31.86,5.873 31.86,5.786 32.446,5.2 37.6,5.2 40,7.6 ; STM1.38 42.411,49.67 40.674,47.933 40.674,47.598 40,15.337 40,7.6 ; v4(49.6,20.9) 49.6,23.5 50.465,24.365 53.435,24.365 J2.08 ; J2.01 52.963,6.52 52.563,6.12 52.563,4.936 51.977,4.35 43.25,4.35 40,7.6
T_CS: J2.11 STM1.27 | length 16
  Top Layer w0.5: STM1.27 48.43,21.73 50,23.3 50,30.823 51.097,31.92 J2.11
T_IRQ: J2.14 STM1.34 | length 7.4
  Bottom Layer w0.5: STM1.34 49.784,39.51 49.814,39.54 J2.14
UART1_RX: STM1.7 STM2.6 | length 55.9
  Top Layer w0.5: v1(36.979,39.5) 36.979,52.779 41.4,57.2 47.7,57.2 50.865,54.035 50.865,46.035 v1(53.3,43.6)
  Bottom Layer w0.5: STM1.7 30.865,39.505 36.974,39.505 v1(36.979,39.5) ; v1(53.3,43.6) 55.864,43.6 57.414,42.05 STM2.6
UART1_TX: STM1.6 STM2.7 | length 65.5
  Bottom Layer w0.5: STM1.6 34.874,42.05 37.236,44.412 37.236,54.564 40.64,57.968 62.432,57.968 63.7,56.7 63.7,40.472 62.738,39.51 STM2.7
UART3_RX: H9.1 STM1.36 | length 74.6
  Top Layer w0.5: v1(60.833,56.667) 62.137,56.667 66.1,60.63 66.1,67.228 67.2,68.328 v1(67.2,74.1)
  Bottom Layer w0.5: STM1.36 49.69,44.59 50.87,45.77 50.87,55.27 52.267,56.667 v1(60.833,56.667) ; v1(67.2,74.1) 67.2,76.855 70.085,79.74 H9.1
UART3_TX: H9.2 STM1.35 | length 169.5
  Top Layer w0.5: STM1.35 42.45,42.05 41.8,41.4 41.8,7.032 47.132,1.7 v1(65,1.7)
  Bottom Layer w0.5: v1(65,1.7) 83.283,1.7 ; 83.283,1.8 88.341,6.858 88.341,13.411 97.929,22.999 97.929,75.944 96.672,77.2 H9.2
VBAT: C5.1 C6.1 D1.2 D2.2 R10.2 STM1.21 STM2.21 | length 65.7
  Top Layer w1: STM1.21 46.1,4.5 47.6,3 64.138,3 67.628,6.49 STM2.21 75.952,6.478 78.222,6.478 82.7,2 89.514,2 90.1,2.586 R10.2 90.11,4.51 90.11,7.79 D1.2 ; D2.2 D1.2 ; C6.1 C5.1 91.65,7.7 90.22,7.7 D1.2
VCC: DB1.1 LT1.4 U4.16 | length 79.9
  Top Layer w1: LT1.4 71.578,70.278 72.8,71.5 v2(96.5,71.5) 96.5,80.601 96.52,80.621 96.52,89.694 94.964,91.25 91.381,91.25 DB1.1
  Bottom Layer w1: U4.16 95.879,54.19 96.341,54.652 96.341,55.117 96.5,55.276 v2(96.5,71.5)
WHT: H1.3 U1.3 | length 24.4
  Top Layer w0.5: U1.3 3.182,69.848 4.852,69.848 5.4,69.3 5.4,63 3.993,61.593 3.993,55.845 3.991,55.843 3.991,50.609 4.414,50.186 6.135,50.186 H1.3
YLW: H1.1 U1.5 | length 22.6
  Top Layer w0.5: U1.5@2.993,64.92 2.993,56.259 2.991,56.258 2.991,46.009 4,45 H1.1
pads on no net: H11.2 STM1.5 STM1.8 STM1.9 STM1.10 STM1.17 STM1.22 STM1.23 STM1.24 STM1.28 STM1.29 STM1.37 STM2.9 STM2.10 STM2.17 STM2.22 STM2.23 STM2.24 STM2.33 STM2.34 STM2.37 STM2.38 U1.11 U1.12 U2.1 U2.2 U2.5 U2.P1 U2.P2 U3.5 U3.6 U3.7
copper on no net:
  other v3: 89.728,20.421 89.723,28.026

## Polygon pours and split planes (outlines as drawn)
GND on Bottom Layer "Bottom Layer-GND" (solid, remove dead copper, pour order 0): 0,0 0,99 99,99 99,0
GND on Top Layer "Top Layer-GND" (solid, remove dead copper, pour order 1): 0,0 0,99 99,99 99,0

## Keep-outs
Keep-Out Layer:
  the board outline again, w0.254

## Silkscreen, mask and mechanical layers (free items; w line width, h text height)
Top Overlay:
  text "Triet Nguyen ft Kien Phan / Tensile/Pressing / Testing Machine / Version 1" at 4.756,67.3 h1